# Altium PCB DEV_BOARD_NEW.PcbDoc
Units mm, origin at the board's own origin, x right, y up, seen from the top; angles counter-clockwise.
Board outline 49.4 x 24.4 mm, 2 copper layers (Top Layer, Bottom Layer); 34 components, 28 nets, 154 pads, 10 vias.
Unrouted connection lines stored in the file: 4.
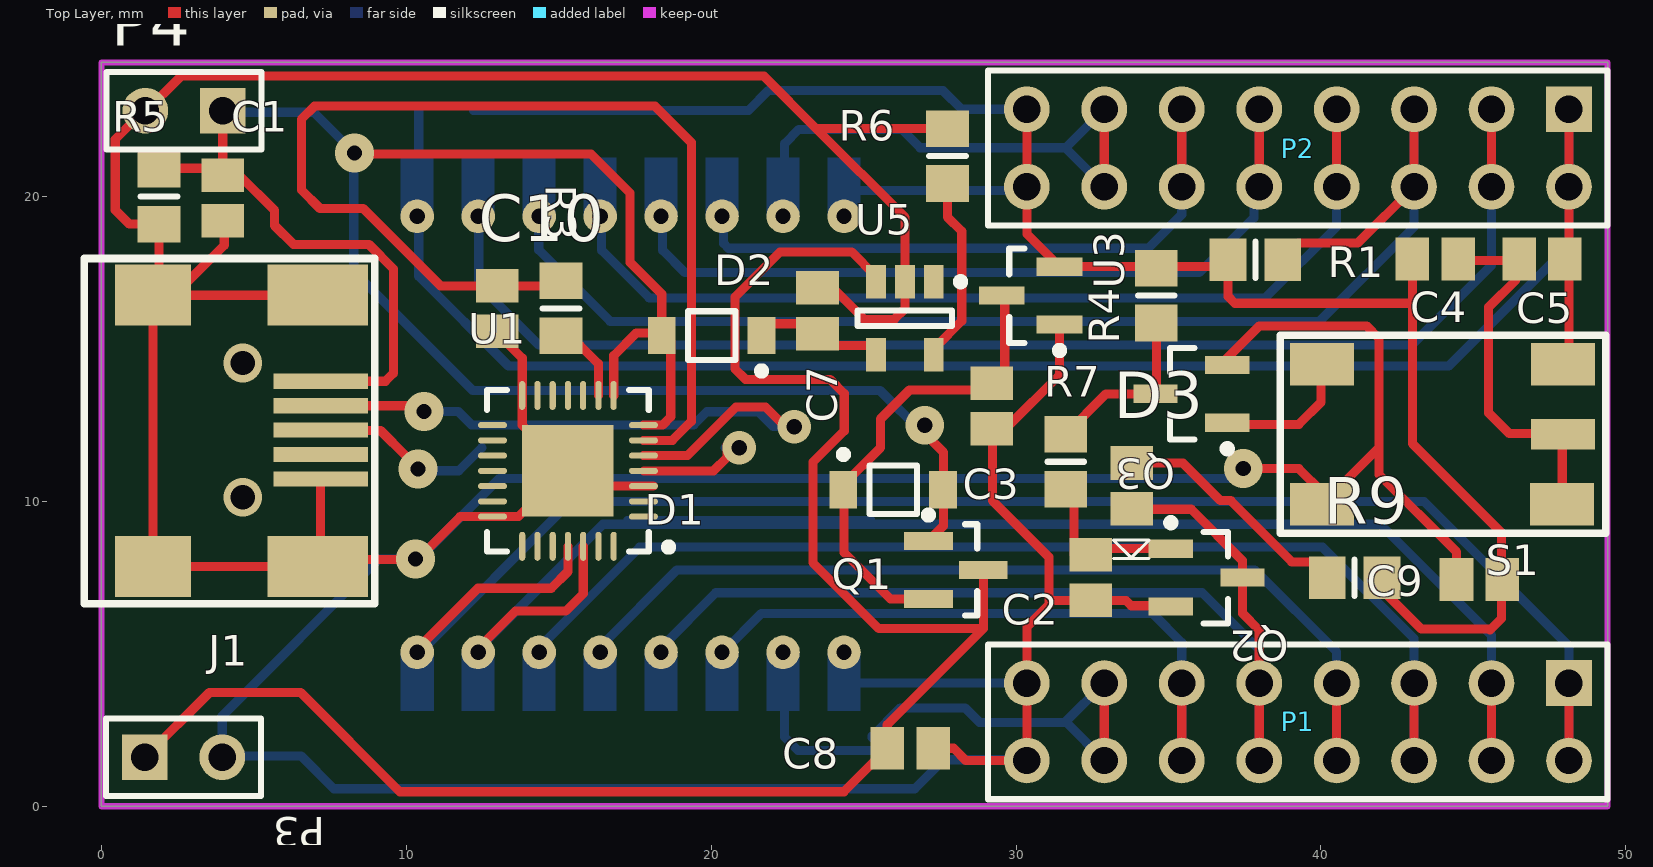
[diagram p0: Top Layer view]
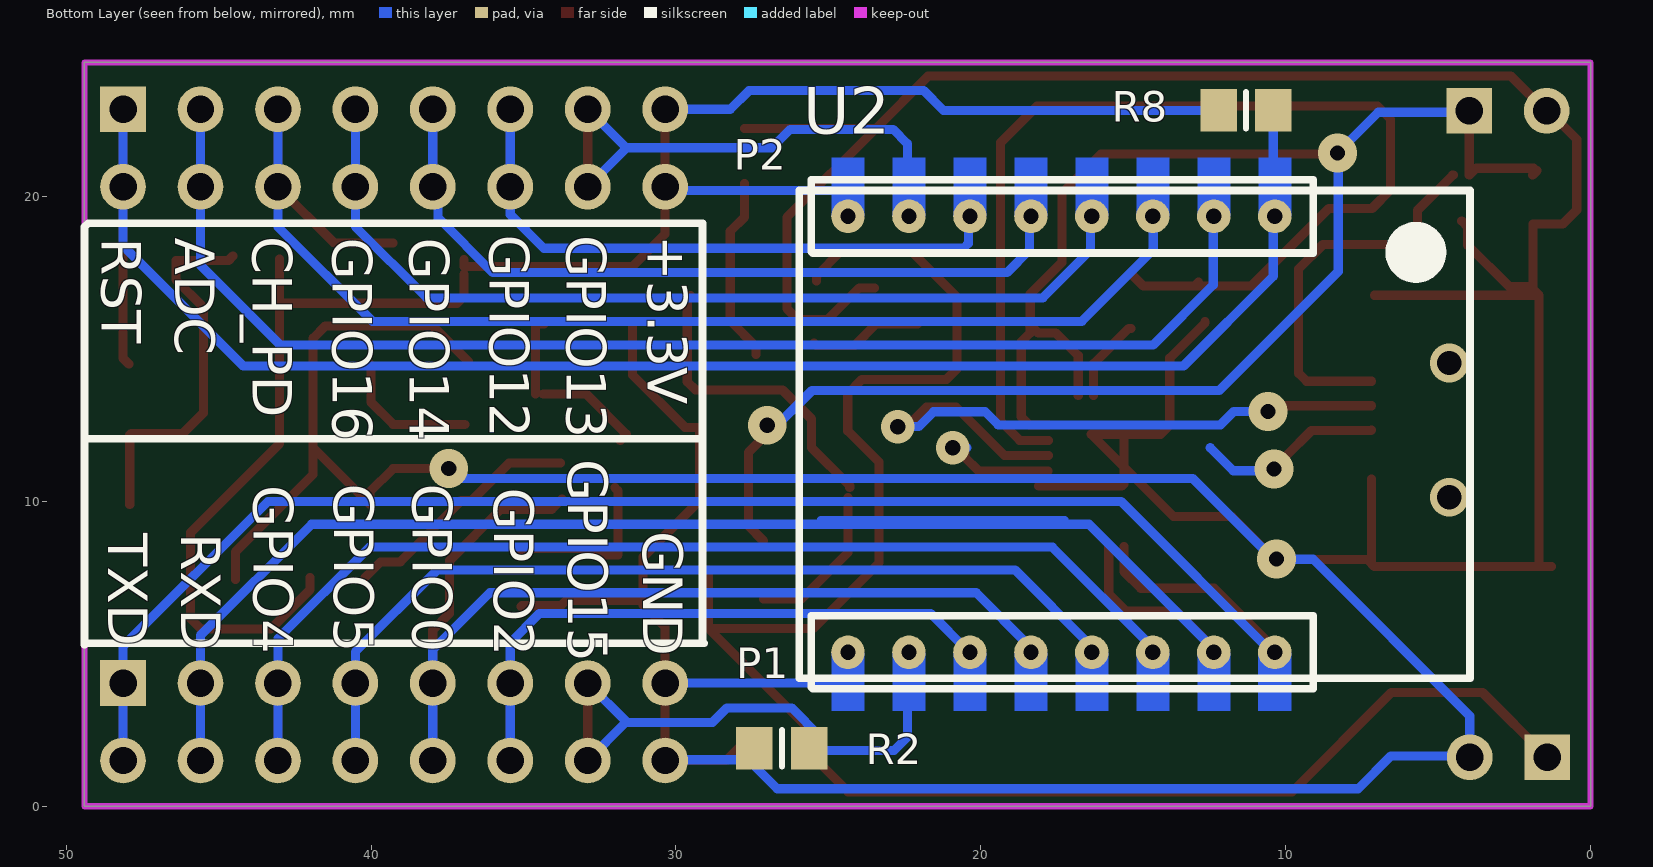
[diagram p1: Bottom Layer view, seen from below]

## Layer stack, top to bottom
Top Solder: solder mask 0.0102, Solder Resist, Dk 3.5
Top Layer: signal copper 0.0356
Dielectric 1: dielectric 0.32, FR-4, Dk 4.8
Bottom Layer: signal copper 0.0356
Bottom Solder: solder mask 0.0102, Solder Resist, Dk 3.5

## Board outline
0,0 49.4,0 49.4,24.4 0,24.4

## Design rules (kind name [scope] priority, off if disabled: settings)
Clearance [All] p1: gap=0.2
PolygonConnect [All] p1: connectstyle=Relief reliefconductorwidth=0.254 reliefentries=4 polygonreliefangle="90 Angle" airgapwidth=0.254
RoutingVias [All] p1: holewidth=0.6 width=1.3 viastyle="Through Hole" minholewidth=0.711 minwidth=1.27 maxholewidth=0.711 maxwidth=1.27
SilkToBoardRegionClearance [All] p1 off:
SilkToSilkClearance [All] p1 off: silktosilkclearance=0.254
SilkToSolderMaskClearance [IsPad] p1 off: minsilkscreentomaskgap=0.254 clearancetoexposedcopper=TRUE
SolderMaskExpansion [All] p1: expansion=0.102
Width [All] p1: maxlimit=0.5 minlimit=0.2 preferedwidth=0.3
26 further rules are at their usual default settings.

## Components (designator, comment, footprint, x,y, rotation, side; value= is the part's Value field where it differs from the comment)
C1 "1uF" C0805 3.975,19.95 r90 top
C2 "2.2uF" C0805 32.45,7.5 r90 top
C3 "1uF" C0805 29.2,13.125 r90 top
C4 "1uF" C0805 43.75,17.95 r180 top
C5 "100nF" C0805 47.25,17.95 r0 top
C7 "1uF" C0805 23.483,16.254 r270 top
C8 "1uF" C0805 26.525,1.9 r180 top
C9 "10uF" C0805 45.195,7.435 r0 top
C10 "100nF" C0805 12.978,16.323 r90 top
D1 "MBR0520LT1G" ONSC-SOD-123-2-425-04_V 25.969,10.379 r0 top
D2 "MBR0520LT1G" ONSC-SOD-123-2-425-04_V 20.016,15.437 r180 top
D3 "LED0" LED0805 33.789,11.183 r270 top
J1 "Mini usb_B" MINI_USB_B 4.2,12.2 r0 top locked
P1 "Header 8X2" HDR2X8 48.133,4.04 r180 top locked
P2 "Header 8X2" HDR2X8 48.133,22.86 r180 top locked
P3 "Header 2" HDR1X2 1.422,1.609 r0 top
P4 "Header 2" HDR1X2 3.979,22.813 r180 top
Q1 "IRLML6402" SOT95P237X112-3N 28.025,7.75 r0 top
Q2 "BSS138" MICRO3_M 36.25,7.5 r0 top
Q3 "BSS138" MICRO3_M 35.75,13.525 r180 top
R1 "47K" 6-0805_N 37.85,17.925 r180 top
R2 "10K" 6-0805_N 26.525,1.9 r0 bottom
R3 "10K" 6-0805_N 15.07,16.33 r90 top
R4 "470K" 6-0805_N 34.6,16.75 r90 top
R5 "10K" 6-0805_N 1.885,19.996 r90 top
R6 "4K" 6-0805_N 27.75,21.325 r270 top
R7 "100K" 6-0805_N 31.625,11.3 r90 top
R8 "10K" 6-0805_N 11.3,22.825 r180 bottom
R9 "100" 6-0805_N 41.1,7.499 r180 top
S1 "STMW" STMW 44,12.2 r180 top
U1 "CP2102-GM" SLAB-QFN-28-3125X3125TP_M 15.3,11 r180 top locked
U2 "ESP07" ESP07 14.95,12.2 r270 bottom locked
U3 "MCP1700T-3302E/TT" SOT-23-TT3_N 30.475,16.75 r180 top
U5 "MCP73831T-2ATI/OT" SOT-23-OT5_N 26.351,16.004 r270 top

## Footprints (in the part's own frame and the unit in brackets; to place one, negate y for a bottom-side part, rotate by r counter-clockwise, add the part's x,y. Pads: shape width x height; smd on the part's side, far side on the other; paste and mask are expansions set on the pad)
6-0805_N [mm] "Chip Resistor, Body 2.0x1.2mm, IPC Medium Density"
  rect 1.2x1.4 smd: 1(-0.9,0) 2(0.9,0)
  silkscreen extent 0,-0.6 0,0.6, body extent -1.07,-0.7 1.07,0.7, height 0.7
C0805 [mm]
  rect 1.1x1.4 smd: 1(-0.75,0) 2(0.75,0)
  body extent -1.1,-0.72 1.1,0.72, height 1.4
ESP07 [mm]
  round 1.1 hole 0.5: 1(-7.15,4.594) 2(-7.15,2.594) 3(-7.15,0.594) 4(-7.15,-1.406) 5(-7.15,-3.406) 6(-7.15,-5.406) 7(-7.15,-7.406) 8(-7.15,-9.406) 9(7.15,4.594) 10(7.15,2.594) 11(7.15,0.594) 12(7.15,-1.406) 13(7.15,-3.406) 14(7.15,-5.406) 15(7.15,-7.406) 16(7.15,-9.406)
  Top Layer region: -9.076,5.137 -7.15,5.137 -7.15,4.053 -9.076,4.053
  Top Layer region: -9.076,3.137 -7.15,3.137 -7.15,2.053 -9.076,2.053
  Top Layer region: -9.076,1.137 -7.15,1.137 -7.15,0.053 -9.076,0.053
  Top Layer region: -9.076,-0.863 -7.15,-0.863 -7.15,-1.947 -9.076,-1.947
  Top Layer region: -9.076,-2.863 -7.15,-2.863 -7.15,-3.947 -9.076,-3.947
  Top Layer region: -9.076,-4.863 -7.15,-4.863 -7.15,-5.947 -9.076,-5.947
  Top Layer region: -9.076,-6.863 -7.15,-6.863 -7.15,-7.947 -9.076,-7.947
  Top Layer region: -9.076,-8.863 -7.15,-8.863 -7.15,-9.947 -9.076,-9.947
  Top Layer region: 9.076,-9.949 7.15,-9.949 7.15,-8.865 9.076,-8.865
  Top Layer region: 9.076,-7.949 7.15,-7.949 7.15,-6.865 9.076,-6.865
  Top Layer region: 9.076,-5.949 7.15,-5.949 7.15,-4.865 9.076,-4.865
  Top Layer region: 9.076,-3.949 7.15,-3.949 7.15,-2.865 9.076,-2.865
  Top Layer region: 9.076,-1.949 7.15,-1.949 7.15,-0.865 9.076,-0.865
  Top Layer region: 9.076,0.051 7.15,0.051 7.15,1.135 9.076,1.135
  Top Layer region: 9.076,2.051 7.15,2.051 7.15,3.135 9.076,3.135
  Top Layer region: 9.076,4.051 7.15,4.051 7.15,5.135 9.076,5.135
  Bottom Layer lines w0.3: 7.444,-7.356 6.994,-7.356
  silkscreen extent -8.35,-11 8.35,11
HDR1X2 [mm] "Connector; Header; 2 Position"
  rect 1.5x1.5 hole 0.9: 1(0,0)
  round 1.5 hole 0.9: 2(2.54,0)
  silkscreen extent -1.27,-1.27 3.81,1.27
HDR2X8 [mm] "Connector; Header; 8x2 Position"
  rect 1.5x1.5 hole 0.9: 1(0,0)
  round 1.5 hole 0.9: 2(0,2.54) 3(2.54,0) 4(2.54,2.54) 5(5.08,0) 6(5.08,2.54) 7(7.62,0) 8(7.62,2.54) 9(10.16,0) 10(10.16,2.54) 11(12.7,0) 12(12.7,2.54) 13(15.24,0) 14(15.24,2.54) 15(17.78,0) 16(17.78,2.54)
  silkscreen extent -1.27,-1.27 19.05,3.81
LED0805 [mm] "Chip Resistor, Body 2.0x1.2mm, IPC High Density"
  rect 1.1x1.4 smd: 1(-0.075,0) 2(1.425,0)
  silkscreen extent 2.45,-0.6 3.05,0.57, body extent -0.43,-0.72 1.78,0.72, height 1.4
MICRO3_M [mm] "SOT23, 3-Leads, Body 2.9x1.3mm, Pitch 0.95mm, Lead Span 2.3mm, IPC Low Density"
  rect 1.45x0.6 smd: 1(-1.175,0.95) 2(-1.175,-0.95) 3(1.175,0)
  silkscreen extent -1.3,-1.5 0.7,1.92, body extent -0.7,-1.5 0.7,1.5, height 1.12
MINI_USB_B [mm]
  rect 3.1x0.5 smd: 1(2.987,1.738) 2(2.987,0.938) 3(2.987,0.138) 4(2.987,-0.663) 5(2.987,-1.463)
  rect 2.5x2 smd: GND(-2.512,-4.337) GND(-2.512,4.563)
  rect 3.3x2 smd: GND(2.887,-4.337) GND(2.887,4.563)
  silkscreen extent -4.76,-5.56 4.76,5.76
ONSC-SOD-123-2-425-04_V [mm] "SOD, 2-Leads, Body 2.69x1.6mm"
  rect 0.91x1.22 smd: 1(-1.635,0) 2(1.635,0)
  silkscreen extent -1.76,-0.8 0.78,1.28, body extent -1.35,-0.8 1.35,0.8, height 1.35
SLAB-QFN-28-3125X3125TP_M [mm] "QFN, 28-Leads, Body 5x5mm, Pitch 0.5mm, Thermal Pad 3.13x3.13mm, IPC Low Density"
  oval 0.95x0.2 smd: 1(-2.475,1.5) 2(-2.475,1) 3(-2.475,0.5) 4(-2.475,0) 5(-2.475,-0.5) 6(-2.475,-1) 7(-2.475,-1.5) 15(2.475,-1.5) 16(2.475,-1) 17(2.475,-0.5) 18(2.475,0) 19(2.475,0.5) 20(2.475,1) 21(2.475,1.5)
  oval 0.2x0.95 smd: 8(-1.5,-2.475) 9(-1,-2.475) 10(-0.5,-2.475) 11(0,-2.475) 12(0.5,-2.475) 13(1,-2.475) 14(1.5,-2.475) 22(1.5,2.475) 23(1,2.475) 24(0.5,2.475) 25(0,2.475) 26(-0.5,2.475) 27(-1,2.475) 28(-1.5,2.475)
  rect 3x3 smd: 29(0,0)
  silkscreen extent -3.42,-2.65 2.65,2.65, body extent -2.5,-2.5 2.5,2.5, height 1
SOT95P237X112-3N [mm] "SOT23, 3-Leads, Body 2.92x2.37mm, Pitch 0.95mm, IPC Medium Density"
  rect 1.6x0.6 smd: 1(-0.9,0.95) 2(0.9,0) 3(-0.9,-0.95)
  silkscreen extent -1.02,-1.5 0.7,1.92, body extent -0.7,-1.52 0.7,1.52, height 1.12
SOT-23-OT5_N [mm] "SOT23, 5-Leads, Body 2.9x1.6mm, Pitch 0.95mm, Lead Span 2.7mm, IPC Medium Density"
  rect 1.1x0.65 smd: 1(-1.2,0.95) 2(-1.2,0) 3(-1.2,-0.95) 4(1.2,-0.95) 5(1.2,0.95)
  silkscreen extent -1.32,-1.55 0.25,1.95, body extent -0.9,-1.55 0.9,1.55, height 1.45
SOT-23-TT3_N [mm] "SOT23, 3-Leads, Body 2.9x1.3mm, Pitch 0.95mm, Lead Span 2.4mm, IPC Medium Density"
  rect 1.5x0.6 smd: 1(-0.95,0.95) 2(-0.95,-0.95) 3(0.95,0)
  silkscreen extent -1.07,-1.55 0.7,1.92, body extent -0.7,-1.52 0.7,1.53, height 1.12
STMW [mm]
  rect 2.1x1 smd: 1(-3.938,0)
  rect 2.1x1.4 smd: 1(-3.912,2.3) 1(3.962,2.3) 2(-3.938,-2.3) 2(3.962,-2.3)
  silkscreen extent -5.34,-3.25 5.34,3.25

## Part data
C1 C2 C3 C4 C5 C7 C8 C9 C10: library part Cap, "Capacitor"
D1 D2: "Schottky Power Rectifier, 2-Pin SOD-123, Pb-Free, Tape and Reel"
D3: "Typical INFRARED GaAs LED"
P1 P2: "Header, 8-Pin, Dual row"
P3 P4: "Header, 2-Pin"
Q2 Q3: "N-Channel MOSFET"
R1 R2 R3 R4 R5 R6 R7 R8 R9: library part Res2, "Resistor"
S1: "Switch"
U1: "Single-Chip USB to UART Bridge, 1024 Bytes EEPROM, -40 to 85 degC, 28-pin QFN, Tube"
U2: "ESP8266"
U3: "Low Quiescent Current LDO, 3-Pin SOT-23, Extended Temperature, Tape and Reel"
U5: "Miniature Single-Cell, Fully Integrated Li-Ion, Li-Polymer Charge Management Controller, 4.2V, 5-Pin SOT-23, Industrial Temperature, Tape and Reel"

## Via types
v1: diameter 1.27, hole 0.5, Top Layer to Bottom Layer, 6 vias
v2: diameter 1.1, hole 0.5, Top Layer to Bottom Layer, 2 vias
v3: diameter 1.27, hole 0.8, Top Layer to Bottom Layer, 2 vias

## Nets (pads, with @x,y where several pads share a name; then routed paths per layer and width w, separated by ;. In a path a pad name is that pad's centre, name@x,y a point inside that pad or via, vN(x,y) a via of type N, cw(c..) or ccw(c..) an arc to the next point about the centre after c; other vN are vias at no path point)
3.3V: C4.2 C9.2 P2.15 P2.16 R1.2 R4.2 R8.1 R9.1 U2.8 U3.2 | length 60.9
  Top Layer w0.3: P2.15 P2.16 30.353,18.772 U3.2 33.225,17.7 36.95,17.7 R1.2 ; R1.2@36.95,17.45 36.95,16.725 37.175,16.5 43,16.5 ; R9.1 42,7.104 43.292,5.812 45.517,5.812 45.546,5.783 45.916,6.153 45.916,8.977 43,11.893 43,16.5 ; C4.2 43,16.5
  Bottom Layer w0.3: R8.1 21.225,22.825 21.875,23.475 27.6,23.475 28.215,22.86 P2.15 ; 24.406,20.2 30.233,20.2 P2.16
ADC: P2.3 P2.4 U2.2 | length 45.9
  Top Layer w0.3: P2.4 P2.3
  Bottom Layer w0.3: 12.406,20.2 12.375,20.169 12.375,17.1 14.346,15.129 42.979,15.129 45.593,17.743 P2.4 P2.3
ENABLE: P2.5 P2.6 R1.1 U2.3 | length 43.9
  Top Layer w0.3: R1.1@39.275,18.475 41.208,18.475 P2.6 P2.5
  Bottom Layer w0.3: 14.4,20.206 14.34,20.146 14.34,18.25 16.688,15.902 39.952,15.902 43.053,19.003 P2.6 P2.5
GND: C1.1 C2.1 C3.1 C4.1 C5.1 C7.1 C8.1 C9.1 C10.1 J1.5 J1.GND P1.15 P1.16 P3.2 P4.2 Q2.2 Q3.2 R2.2 R5.1 R6.1 S1.1 U1.3 U1.14 U1.21 U1.29 U2.16 U3.1 U5.2 | length 222.4
  Top Layer w0.3: J1.GND@1.275,7.863 J1.GND@1.687,7.863 ; P4.2@1.391,22.727 2.614,23.95 21.725,23.95 23.45,22.225 ; P4.2@1.421,22.843 0.45,21.872 0.45,19.557 0.911,19.096 R5.1 1.885,16.96 J1.GND@1.687,16.763 ; J1.GND@1.95,17.05 2.675,17.05 4.025,18.4 4.025,19 C1.1@4.225,19.2 ; J1.GND@7.087,16.763 J1.GND@1.687,16.763 ; J1.5 7.187,7.963 J1.GND@7.087,7.863 ; C10.1@12.639,15.89 12.639,15.857 13.8,14.697 13.8,12.5 14.1,12.2 16.375,12.2 13.675,9.5 11.768,9.5 10.356,8.088 7.313,8.088 J1.GND@7.087,7.863 ; U1.29@15.3,12.2 15.3,10.575 15.375,10.5 U1.3@18.1,10.5 ; C7.1 23.981,17.004 25.015,15.97 26.005,15.97 26.36,16.325 26.36,17.91 26.359,17.911 26.359,19.316 23.45,22.225 ; C8.1 27.95,1.9 28.35,1.5 P1.16 P1.15 30.353,5.878 31.075,6.6 31.075,8.175 29.225,10.025 29.225,12.425 29.7,12.425 31.425,14.15 U3.1 ; R6.1 25.9,22.225 23.45,22.225 ; 31.225,6.75 C2.1 33.6,6.75 33.775,6.575 35.05,6.575 Q2.2 ; Q3.2@36.812,14.587 37.975,15.75 41.5,15.75 41.9,15.35 41.9,11.762 ; v1(37.45,11.075) 39.275,11.075 40.038,10.312 40.038,9.9 41.9,11.762 ; C9.1 44.445,8.341 41.9,10.886 41.9,11.762 ; C4.1@44.525,18.05 44.675,17.9 46.4,17.9 46.4,17.275 45.5,16.375 45.5,12.9 46.175,12.225 47.863,12.225 47.913,12.175 S1.1@47.913,9.9 ; J1.GND@1.687,7.863 J1.GND@7.087,7.863 ; J1.GND@1.687,7.863 J1.GND@1.687,16.763
  Bottom Layer w0.3: P3.2 4.001,1.648 6.549,1.648 7.622,0.575 26.675,0.575 27.625,1.525 30.328,1.525 P1.16 ; P3.2@3.961,1.825 3.961,2.961 9.1,8.1 10.397,8.1 13.047,10.75 37.2,10.75 v1@37.45,11 ; 24.406,4.2 24.566,4.04 P1.15
  other v1: 10.299,8.108
GPIO0: D3.2 P1.9 P1.10 Q2.3 U2.13 | length 37.1
  Top Layer w0.3: D3.2@33.741,10.072 34.073,9.74 35.743,9.74 37.425,8.058 Q2.3 37.425,6.325 37.973,5.777 P1.9 P1.10
  Bottom Layer w0.3: 18.406,4.2 18.406,5.256 20.15,7 36.1,7 37.973,5.127 P1.9 P1.10
GPIO2: P1.11 P1.12 U2.14 | length 23.2
  Top Layer w0.3: P1.12 P1.11
  Bottom Layer w0.3: 20.406,4.2 20.406,5.081 21.65,6.325 34.475,6.325 35.433,5.367 P1.11 P1.12
GPIO4: P1.5 P1.6 U2.11 | length 38.8
  Top Layer w0.3: P1.6 P1.5
  Bottom Layer w0.3: 14.406,4.2 14.406,5.256 17.65,8.5 40.05,8.5 43.053,5.497 P1.5 P1.6
GPIO5: P1.7 P1.8 U2.12 | length 33.4
  Top Layer w0.3: P1.8 P1.7
  Bottom Layer w0.3: 16.406,4.2 16.406,5.281 18.875,7.75 37.825,7.75 40.513,5.062 P1.7 P1.8
GPIO12: P2.11 P2.12 U2.6 | length 23.3
  Top Layer w0.3: P2.12 P2.11
  Bottom Layer w0.3: 20.406,20.2 20.406,18.46 20.562,18.304 34.329,18.304 35.433,19.408 P2.12 P2.11
GPIO13: P2.13 P2.14 U2.7 | length 17.3
  Top Layer w0.3: P2.14 P2.13
  Bottom Layer w0.3: 22.406,20.2 22.406,21.731 22.875,22.2 26.25,22.2 26.85,21.6 31.633,21.6 ; P2.14 31.633,21.58 31.633,21.6 ; P2.13 31.633,21.6
GPIO14: P2.9 P2.10 U2.5 | length 28.6
  Top Layer w0.3: P2.10 P2.9
  Bottom Layer w0.3: 18.406,20.2 18.406,18.238 19.141,17.503 36.003,17.503 37.8,19.3 37.8,20.147 P2.10 P2.9
GPIO15: P1.13 P1.14 R2.1 U2.15 | length 19.1
  Top Layer w0.3: P1.14 P1.13
  Bottom Layer w0.3: 22.406,4.2 22.406,2.269 22.85,1.825 25.7,1.825 25.275,2.25 25.275,2.3 26.2,3.225 28.325,3.225 28.8,2.75 31.603,2.75 ; P1.14 31.643,2.75 31.603,2.75 ; P1.13 31.603,2.75
GPIO16: P2.7 P2.8 U2.4 | length 34.1
  Top Layer w0.3: P2.8 P2.7
  Bottom Layer w0.3: 16.406,20.2 16.406,18.235 17.966,16.675 38.175,16.675 40.513,19.013 P2.8 P2.7
NetC2_2: C2.2 Q2.1 R7.1 | length 5.5
  Top Layer w0.3: R7.1@32,10.45 31.9,10.35 31.9,8.25 C2.2 32.65,8.45 35.025,8.45 Q2.1@35.075,8.4
NetC3_2: C3.2 D1.1 Q1.3 U3.3 | length 15.4
  Top Layer w0.3: D1.1@24.297,10.45 24.297,10.511 25.55,11.764 25.55,12.7 26.502,13.652 29.352,13.652 29.625,13.925 29.625,16.65 U3.3 ; D1.1@24.357,10.125 24.357,8.318 25.875,6.8 Q1.3
NetC7_2: C7.2 D2.1 U5.4 | length 3.8
  Top Layer w0.3: D2.1@22.05,15.85 22.075,15.825 23.425,15.825 24.141,15.109 25.385,15.109 U5.4@25.475,15.199
NetC8_2: C8.2 P3.1 Q1.2 U5.3 | length 58.7
  Top Layer w0.3: P3.1 3.543,3.73 6.533,3.73 9.788,0.475 24.35,0.475 C8.2 25.775,2.675 28.925,5.825 Q1.2 ; U5.3@25.385,17.231 25.385,17.401 24.603,18.183 22.26,18.183 20.775,16.698 20.775,14.35 21.128,13.997 23.899,13.997 24.361,13.535 24.361,12.313 23.335,11.287 23.335,7.99 25.5,5.825 28.9,5.825
NetC10_2: C10.2 R3.2 U1.6 | length 36.9
  Top Layer w0.3: C10.2@12.863,17.188 12.986,17.065 14.665,17.065 R3.2@15.075,17.475 ; C10.2 12.969,17.064 11.122,17.064 8.581,19.605 7.167,19.605 6.555,20.217 6.555,22.532 6.991,22.968 18.153,22.968 19.35,21.771 19.35,12.625 18.725,12 U1.6
NetD3_1: D3.1 R9.2 | length 8
  Top Layer w0.3: D3.1 35.469,11.258 36.703,10.024 37.039,10.024 39.04,8.023 39.04,8.015 39.684,8.015 R9.2
NetJ1_2: J1.2 U1.5 | length 21.5
  Top Layer w0.3: J1.2 v1@10.113,13.138 ; U1.5 19.218,11.5 20.81,13.092 21.784,13.092 22.43,12.446 v2(22.724,12.446)
  Bottom Layer w0.3: v1(10.576,12.946) 11.7,12.946 12.138,12.508 19.425,12.508 19.856,12.939 21.548,12.939 22.035,12.452 22.718,12.452 v2(22.724,12.446)
NetJ1_3: J1.3 U1.4 | length 17.6
  Top Layer w0.3: J1.3 7.2,12.325 9.15,12.325 10,11.475 v1@10.3,11.475 ; U1.4@17.8,11 20.075,11 20.525,11.45 v2@20.525,11.85
  Bottom Layer w0.3: v1@10.3,11.475 10.771,11.004 11.72,11.004 12.475,11.759 ; 17.259,9.365 25.243,9.365 ; v2@20.459,11.759 v2@20.55,11.85
  other v1: 10.38,11.064
  other v2: 20.915,11.762
NetQ3_3: Q3.3 R4.1 R7.2 | length 6.1
  Top Layer w0.3: R7.2@31.825,12 R7.2 32.95,13.525 Q3.3@34.35,13.525 ; R4.1@34.325,15.825 34.6,15.825 Q3.3@34.6,13.525
NetR3_1: R3.1 U1.9 | length 2.7
  Top Layer w0.3: R3.1@15.075,15.675 15.141,15.675 16.3,14.516 16.3,14.5 U1.9
NetR6_2: R6.2 U5.5 | length 6.2
  Top Layer w0.3: U5.5@27.375,14.812 27.375,15.079 28.215,15.919 28.215,18.86 27.75,19.325 R6.2
RESET: C5.2 P2.1 P2.2 Q3.1 R8.2 S1.2 U2.1 | length 63.6
  Top Layer w0.3: Q3.1@36.925,12.525 39.275,12.525 40,13.25 40,14.462 S1.2@40.038,14.5 ; S1.2@47.938,14.5 48.133,14.695 P2.2 P2.1
  Bottom Layer w0.3: R8.2 10.406,22.819 10.406,17.382 13.349,14.439 44.189,14.439 48.133,18.383 P2.2 P2.1
RXD: P1.3 P1.4 U1.26 U2.10 | length 49.3
  Top Layer w0.3: U2.10 12.356,5.181 13.575,6.4 15.225,6.4 15.8,6.975 U1.26 ; P1.4 P1.3
  Bottom Layer w0.3: U2.10@12.406,4.756 12.406,5.206 16.45,9.25 41.95,9.25 45.593,5.607 P1.3 P1.4
TXD: P1.1 P1.2 U1.25 U2.9 | length 55
  Top Layer w0.3: U2.9@10.325,5.125 12.35,7.15 14.75,7.15 15.3,7.7 U1.25 ; P1.2 P1.1
  Bottom Layer w0.3: U2.9@10.325,4.925 15.4,10 43.375,10 48.133,5.242 P1.1 P1.2
VCC_USB: C1.2 D1.2 D2.2 J1.1 P4.1 Q1.1 R5.2 U1.7 U1.8 | length 72.5
  Top Layer w0.3: R5.2@1.75,20.85 R5.2@1.9,20.7 ; R5.2@1.875,20.925 3.75,20.925 C1.2 3.979,20.704 P4.1 ; C1.2@4.5,20.7 4.525,20.7 5.675,19.55 5.675,19.05 6.3,18.425 8.774,18.425 9.575,17.624 9.575,14.2 9.313,13.938 J1.1 ; v1(8.3,21.425) 8.326,21.399 13.241,21.399 13.243,21.397 16.053,21.397 17.341,20.109 17.341,17.834 18.375,16.8 18.375,15.525 18.673,15.227 18.673,12.773 18.4,12.5 U1.7 ; U1.8 16.8,14.779 17.542,15.521 18.115,15.521 D2.2@18.425,15.831 ; v1@27.025,12.2 27.62,11.605 27.62,9.195 Q1.1
  Bottom Layer w0.3: P4.1@3.945,22.761 6.964,22.761 8.275,21.45 8.275,17.54 12.177,13.638 25.537,13.638 v1@26.9,12.275
  other v1: 27,12.5
pads on no net: J1.4 U1.1 U1.2 U1.10 U1.11 U1.12 U1.13 U1.15 U1.16 U1.17 U1.18 U1.19 U1.20 U1.22 U1.23 U1.24 U1.27 U1.28 U5.1
copper on no net:
  other v3: 4.637,10.138 4.637,14.538

## Keep-outs
Keep-Out Layer:
  the board outline again, w0.2

## Silkscreen, mask and mechanical layers (free items; w line width, h text height)
Bottom Overlay:
  lines w0.254: 29.125,12.05 49.35,12.05 ; 29.075,5.35 49.35,5.35 49.4,5.3 49.4,19 49.275,19.125 29.125,19.125 29.125,5.4 29.075,5.35
  text "GPIO12" at 36.1,18.75 h1.3 r90
  text "+3.3V" at 30.925,18.725 h1.3 r90
  text "GPIO13" at 33.575,18.725 h1.3 r90
  text "CH_PD" at 43.875,18.7 h1.3 r90
  text "GPIO14" at 38.725,18.65 h1.3 r90
  text "GPIO16" at 41.25,18.65 h1.3 r90
  text "ADC" at 46.425,18.65 h1.3 r90
  text "RST" at 48.825,18.65 h1.3 r90
  text "GPIO15" at 33.525,11.375 h1.3 r90
  text "GPIO0" at 38.625,10.575 h1.3 r90
  text "GPIO5" at 41.2,10.575 h1.3 r90
  text "GPIO4" at 43.85,10.525 h1.3 r90
  text "GPIO2" at 35.95,10.45 h1.3 r90
  text "GND" at 31.075,9.025 h1.3 r90
  text "RXD" at 46.225,8.95 h1.3 r90
  text "TXD" at 48.625,8.95 h1.3 r90